# Altium PCB N-BASEU68.PcbDoc
Units mm, origin at the board's own origin, x right, y up, seen from the top; angles counter-clockwise.
Board outline 33.03 x 43.18 mm, 4 copper layers (Top Layer, Signal Layer 1, GND-PLANE, Bottom Layer), stack 1.583 mm thick; 51 components, 57 nets, 221 pads, 80 vias.
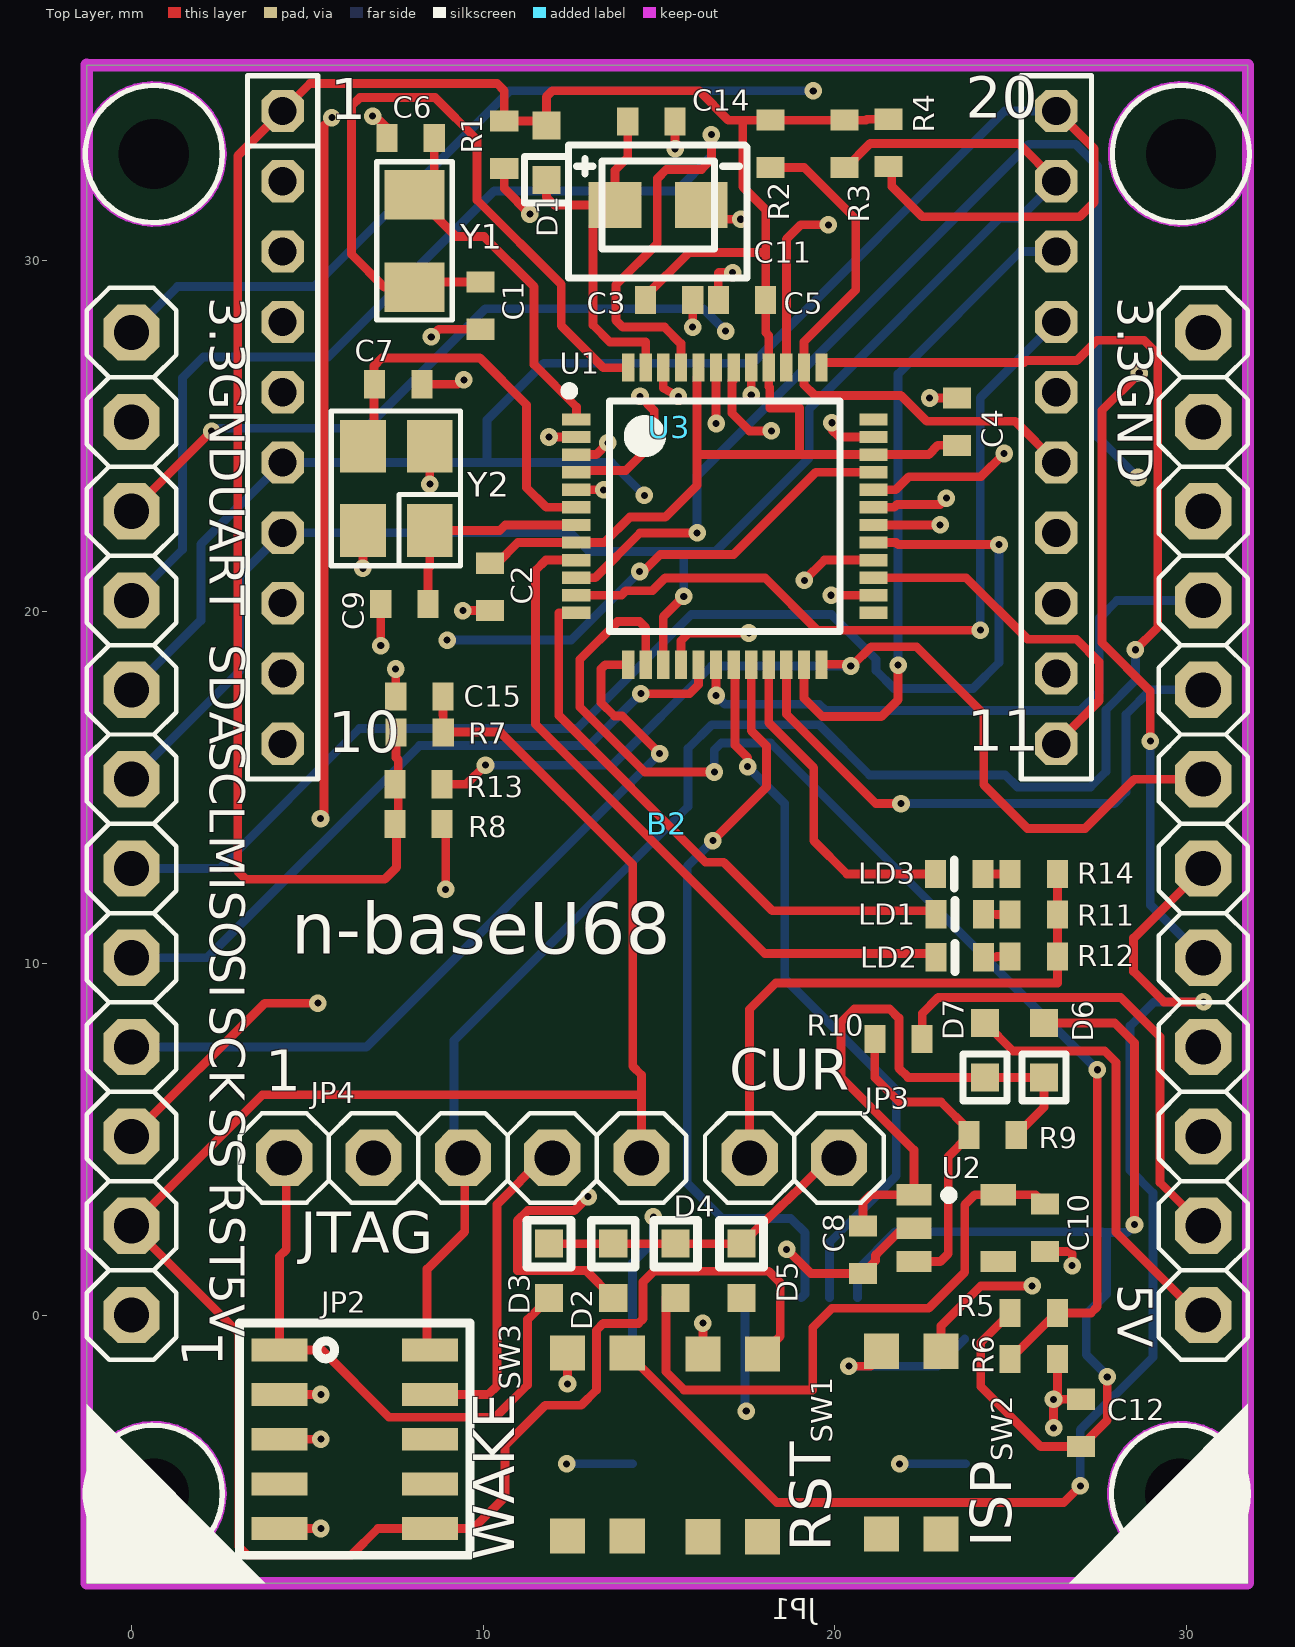
[diagram p0: Top Layer view]
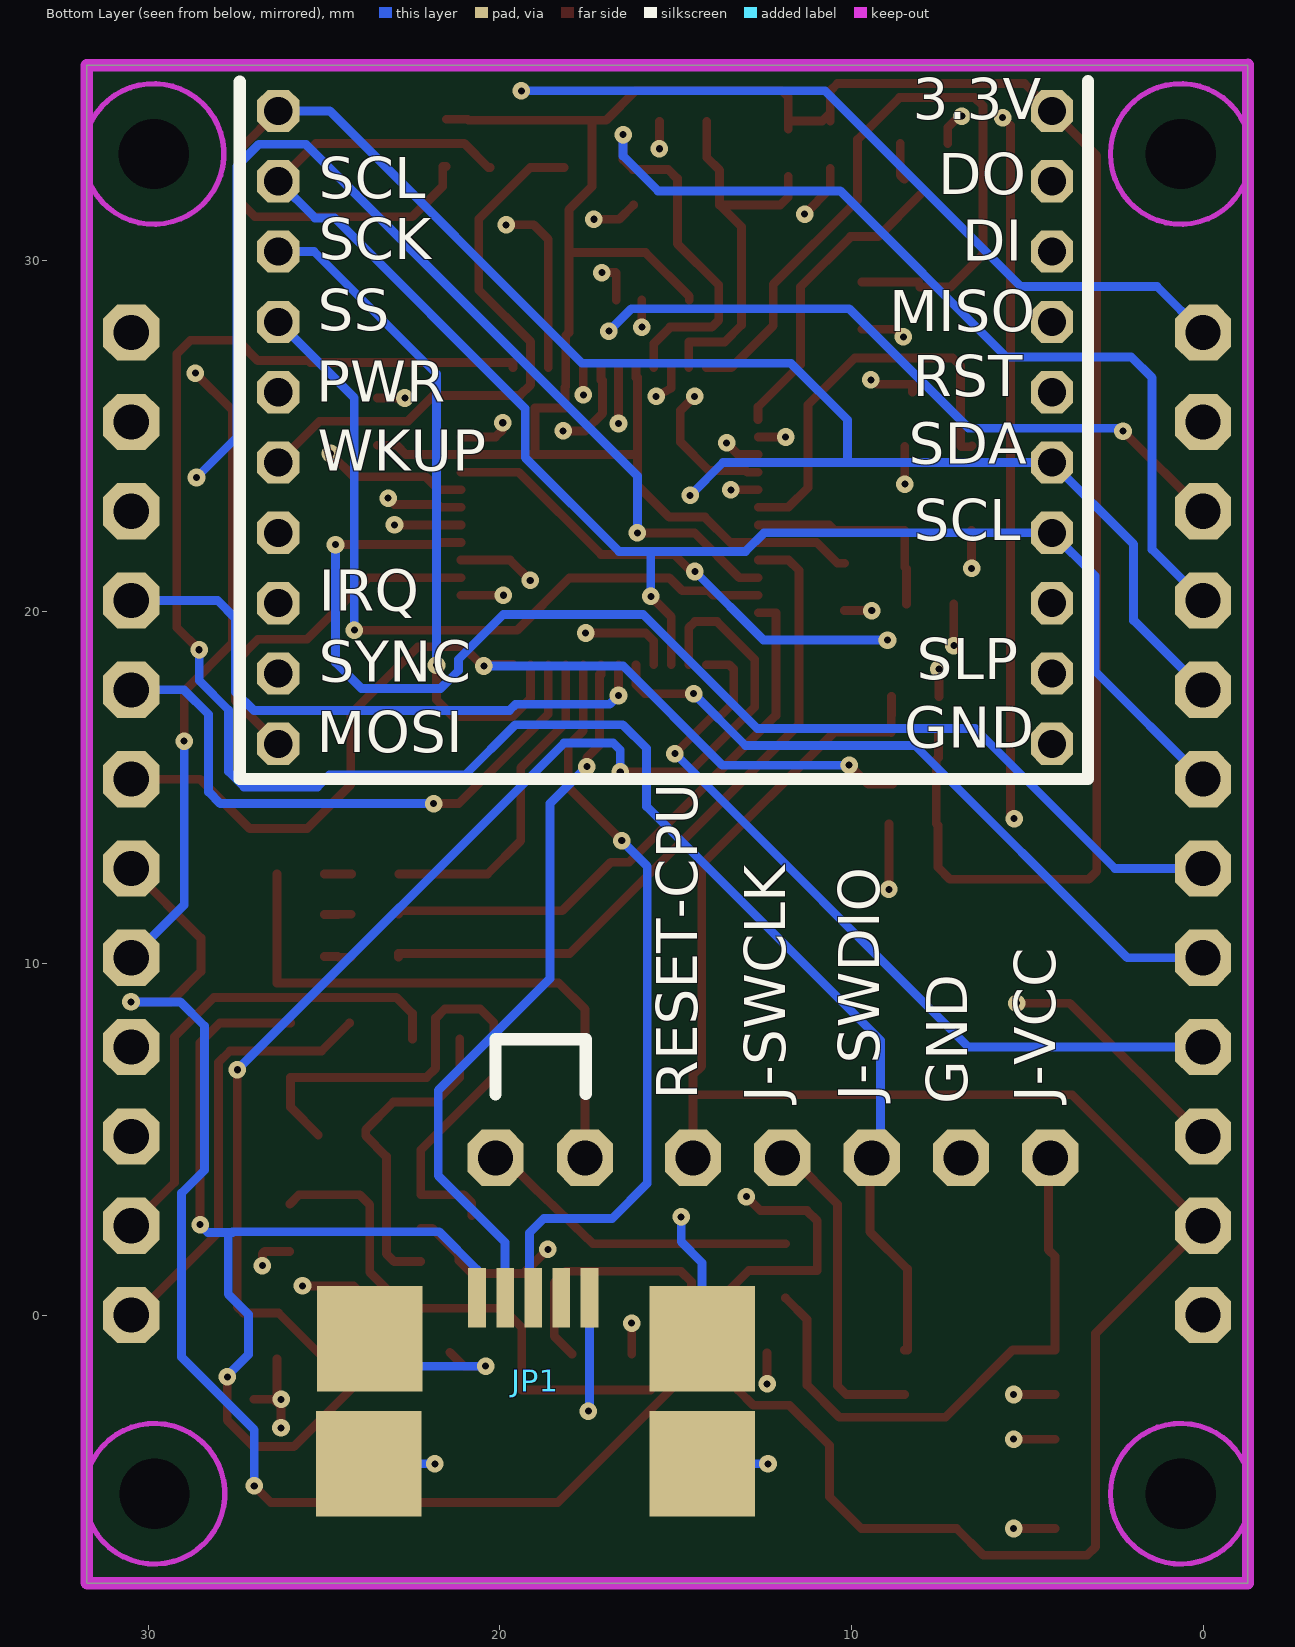
[diagram p1: Bottom Layer view, seen from below]
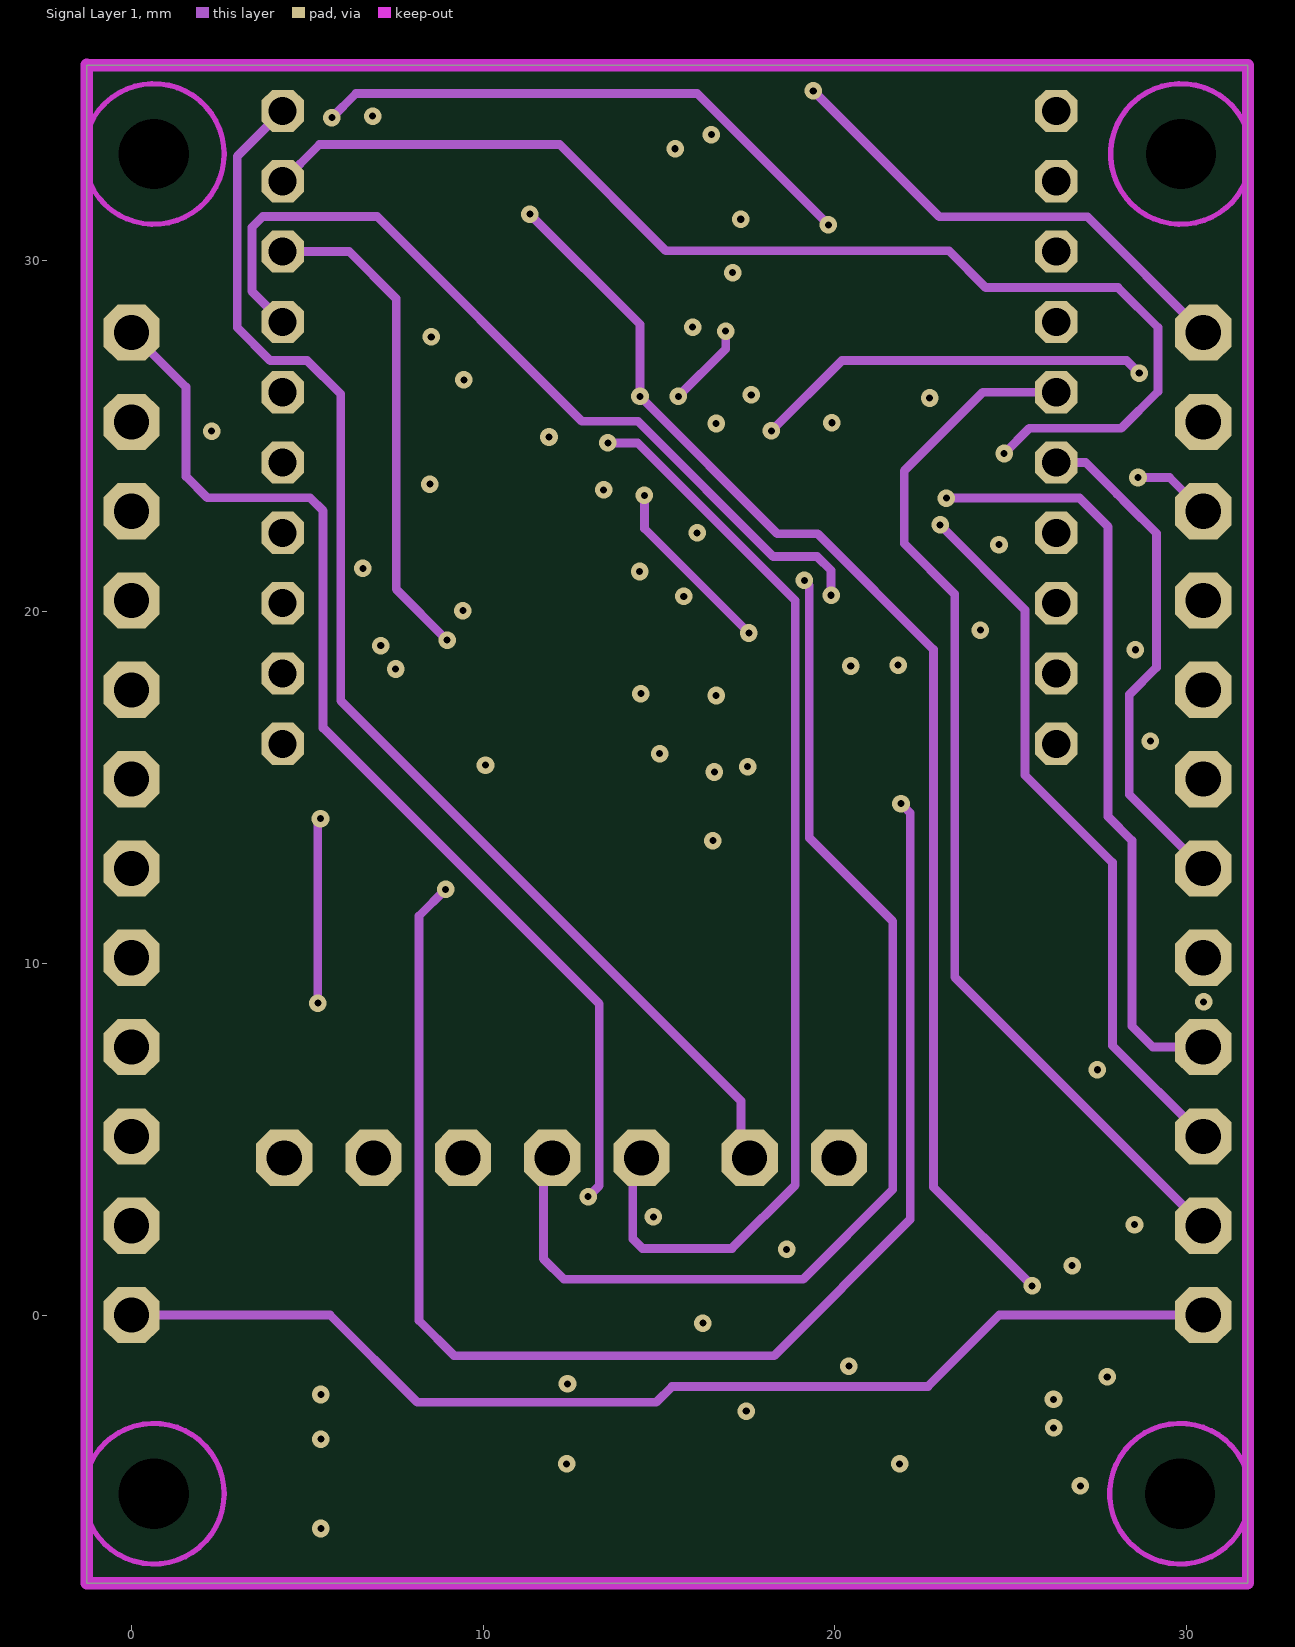
[diagram p2: Signal Layer 1]
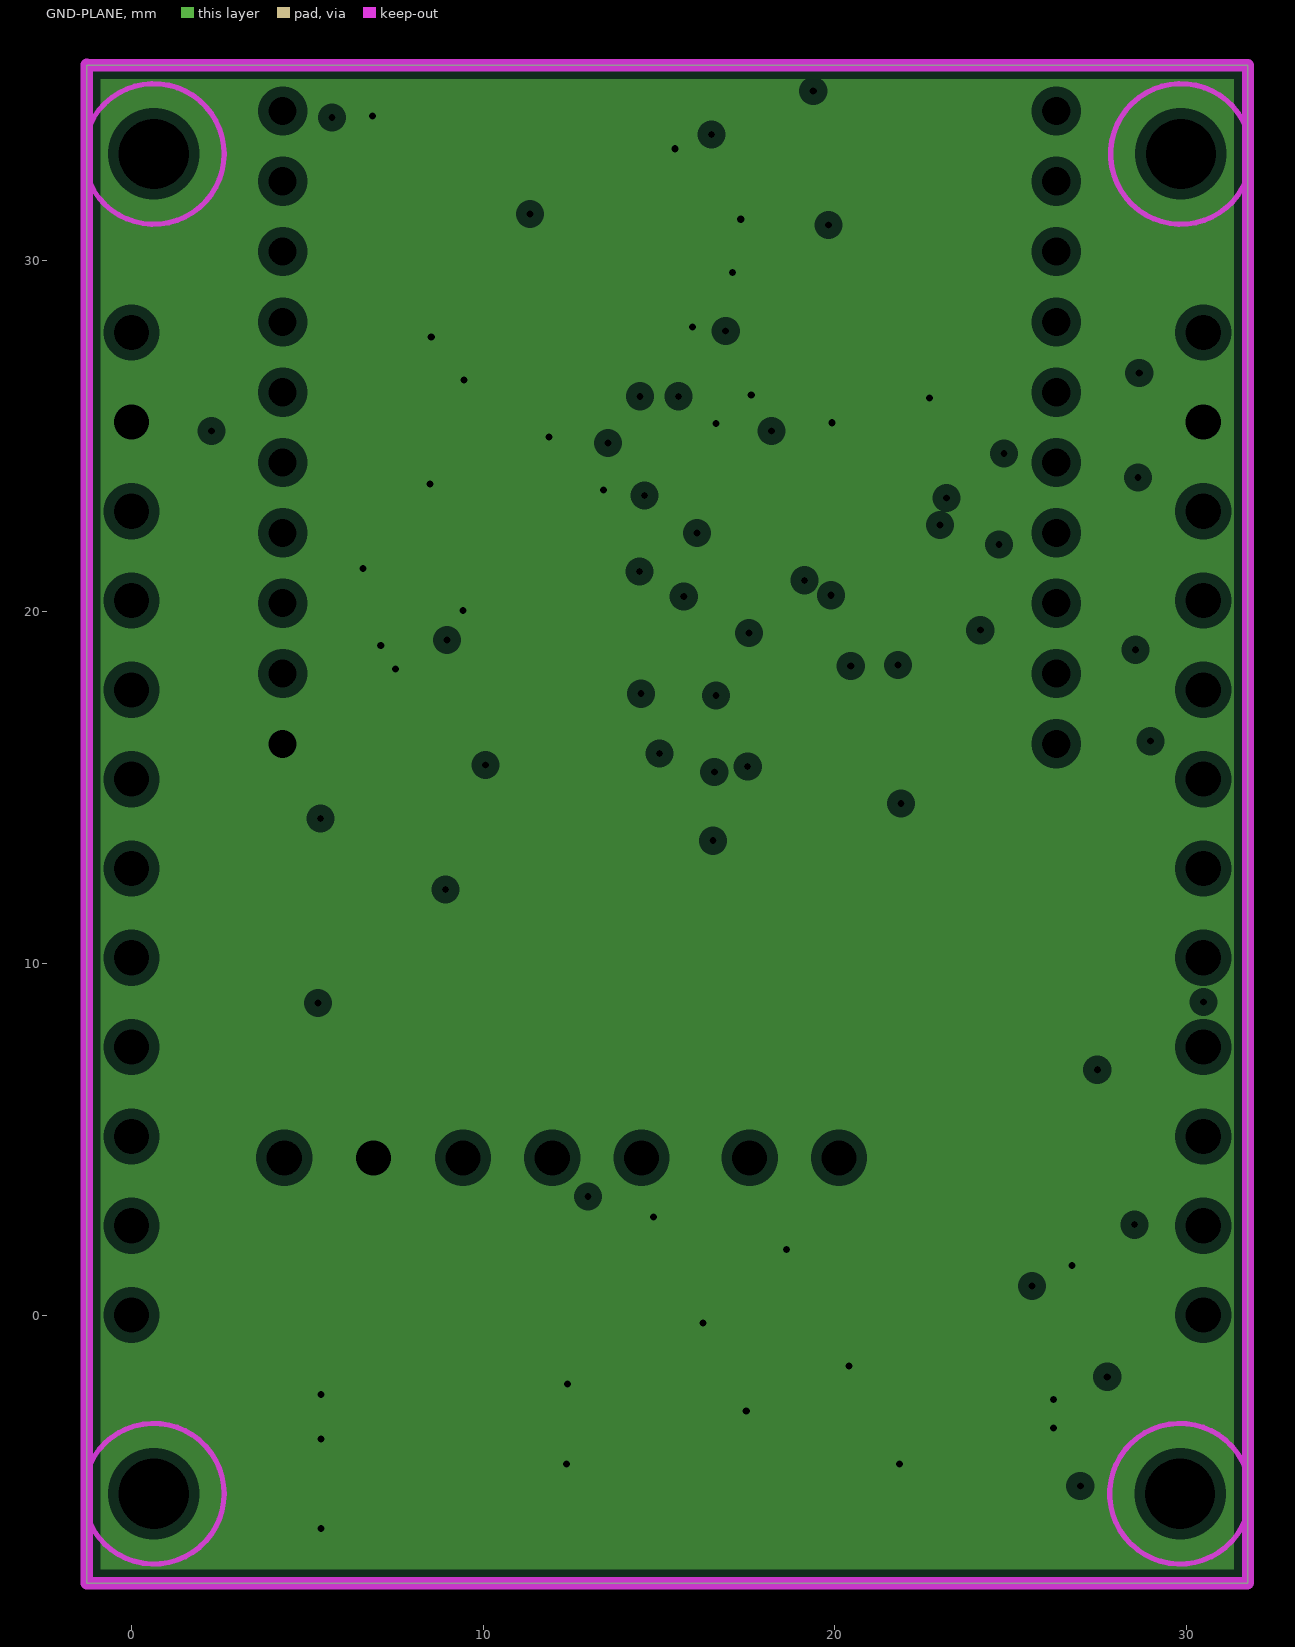
[diagram p3: GND-PLANE, clearances drawn from the general rule]

## Layer stack, top to bottom
Top Solder: solder mask 0.0102, Solder Resist, Dk 3.5
Top Layer: signal copper 0.0356
Dielectric1: core 0.48, FR-4, Dk 4.8
Signal Layer 1: signal copper 0.036
Dielectric 3: prepreg 0.48, Dk 4.2
GND-PLANE: plane copper 0.0356, net GND
Dielectric2: core 0.48, FR-4, Dk 4.2
Bottom Layer: signal copper 0.0356
Bottom Solder: solder mask 0.0102, Solder Resist, Dk 3.5

## Board outline
-1.275,-7.625 31.75,-7.625 31.75,35.55 -1.275,35.55

## Design rules (kind name [scope] priority, off if disabled: settings)
Clearance "Clearance IN CLASS 1mm" [(InNetClass('CL-1mm'))] p1 off: gap=1
Clearance Clearance_GND_PLANE [InNamedPolygon('GND_POLY_TOP')] p2 off: gap=0.4
Clearance Clearance_+5V_POLY [InNamedPolygon('poly_+5V-bottom')] p3 off: gap=0.5
Clearance [All] p4: gap=0.15
MinimumAnnularRing [All] p1: minimumring=0.149
PlaneClearance [All] p1: clearance=0.3
PlaneConnect Plane_ConnectStyle_1 [(Name = 'C1-1') Or (Name = 'C1-2') Or (Name = 'C2-1') Or (Name = 'C2-2') Or (Name = 'C3-1') Or (Name = 'C3-2') Or (Name = 'C4-1') Or (Name = 'C4-2') Or (Name = 'C5-1') Or (Name = 'C5-2') Or (Name = 'C6-1') Or (Name = 'C6-2') Or (Name = 'C7-1')] p1 off: planeconnectstyle=Relief reliefexpansion=1.27 reliefentries=4 reliefconductorwidth=0.381 reliefairgap=0.508
PlaneConnect [All] p2: planeconnectstyle=Direct reliefexpansion=0.635 reliefentries=4 reliefconductorwidth=0.305 reliefairgap=0.254
PolygonConnect [All] p1: connectstyle=Direct reliefconductorwidth=0.254 reliefentries=4 polygonreliefangle="90 Angle" airgapwidth=0.254
RoomDefinition N-BASEU68 [InComponentClass('N-BASEU68')] p1: confinementstyle=ConfineIn formatcopy=TRUE lockcomponents=FALSE outline -5.605,46.58 33.13,46.58 33.13,3.4 -5.605,3.4
RoutingVias VIASWITDTH2MM [(InNetClass('W-2mm'))] p1 off: holewidth=1 width=1.8 viastyle="Through Hole" minholewidth=0.4 minwidth=0.7 maxholewidth=1 maxwidth=1.8
RoutingVias VIASWITDTH1MM [(InNetClass('W-2mm'))] p2 off: holewidth=0.5 width=1 viastyle="Through Hole" minholewidth=0.5 minwidth=1 maxholewidth=0.5 maxwidth=1
RoutingVias VIASWITDTH1.5MM [(InNetClass('W-2mm'))] p3 off: holewidth=0.9 width=1.4 viastyle="Through Hole" minholewidth=0.9 minwidth=1.4 maxholewidth=0.9 maxwidth=1.4
RoutingVias [All] p4: holewidth=0.2 width=0.5 viastyle="Through Hole" minholewidth=0.2 minwidth=0.5 maxholewidth=0.2 maxwidth=0.5
SilkToSolderMaskClearance SilkscreenOverComponentPads [IsPad] p1: minsilkscreentomaskgap=0.254 clearancetoexposedcopper=TRUE
SolderMaskExpansion [All] p1: expansion=0
Width 12V_PLANE [(InNet('+12V')) and (IsPolygon)] p1 off: maxlimit=0.3 minlimit=0.2 preferedwidth=0.2
Width GND_PLANE [(InNet('GND'))  and (IsPolygon)] p2 off: maxlimit=0.3 minlimit=0.2 preferedwidth=0.2
Width WIDTH2MM [(InNetClass('W-2mm'))] p3 off: maxlimit=2 minlimit=0.25 preferedwidth=2
Width WIDTH1.5MM [(InNetClass('W-1.5mm'))] p4 off: maxlimit=2 minlimit=0.5 preferedwidth=1.5
Width "WIDTH 1MM" [(InNetClass('W-1mm'))] p5 off: maxlimit=2 minlimit=0.75 preferedwidth=1
Width WIDTH0.5MM [(InNetClass('W-0.5mm'))] p6 off: maxlimit=2 minlimit=0.25 preferedwidth=0.5
Width WIDTH0.25MM [(InNetClass('W-0.25mm'))] p7 off: maxlimit=2 minlimit=0.2 preferedwidth=0.25
Width [All] p8: maxlimit=2 minlimit=0.25 preferedwidth=0.25
27 further rules are at their usual default settings.

## Components (designator, comment, footprint, x,y, rotation, side; value= is the part's Value field where it differs from the comment)
B2 "N-GMS" N-GMS 0,33.025 r270 top locked
C1 "22pF" 0603_cap 9.925,28.725 r270 top
C2 "100nF" 0603_cap 10.2,20.725 r270 top
C3 "100nF" 0603_cap 15.275,28.875 r0 top
C4 "100nF" 0603_cap 23.475,25.4 r90 top
C5 "100nF" 0603_cap 17.375,28.875 r180 top
C6 "18pF" 0603_cap 7.95,33.475 r180 top
C7 "6.8pF" 0603_cap 7.575,26.475 r0 top
C8 "1uF/MLCC" 0603_CAP 20.8,1.85 r90 top
C9 "6.8pF" 0603_cap 7.775,20.225 r180 top
C10 "1uF/MLCC" 0603_CAP 25.975,2.475 r90 top
C11 "0.011F" "SUPERCAP  PAS3225P3R3113" 14.975,31.625 r0 top
C12 "100nF" 0603_cap 27,-3.05 r270 top
C14 "10uF/MLCC" 0603_CAP 14.8,33.95 r180 top
C15 "100nF" 0603_cap 8.2,17.6 r180 top
D1 "NSR20F30NXT5G" 0603_DIODE-CDSU101A 11.8,33.075 r270 top
D2 "NSR20F30NXT5G" 0603_DIODE-CDSU101A 13.7,1.25 r90 top
D3 "NSR20F30NXT5G" 0603_DIODE-CDSU101A 11.875,1.25 r90 top
D4 "NSR20F30NXT5G" 0603_DIODE-CDSU101A 15.475,1.25 r90 top
D5 "NSR20F30NXT5G" 0603_DIODE-CDSU101A 17.35,1.25 r90 top
D6 "NSR20F30NXT5G" 0603_DIODE-CDSU101A 25.95,7.55 r270 top
D7 "NSR20F30NXT5G" 0603_DIODE-CDSU101A 24.275,7.55 r270 top
JP1 "USB-MINI-B" USB-MINI-B-HIR-UX60A-MB-5ST 17.4,-0.325 r0 bottom
JP2 "Header 5X2 1.27mm" 2x5-1.27mm-HARWIN-855-M50-3600542 6.35,-3.525 r270 top
JP3 "HEADER-2" 1X02 18.85,4.475 r180 top
JP4 "HEADER_5" 1X05 9.425,4.475 r0 top
LD1 "LED_RED" 0603_LED_RED 23.569,11.403 r180 top
LD2 "LED_GRN" 0603_LED_GRN 23.569,10.179 r180 top
LD3 "LED_BLU" 0603_LED_BLU 23.55,12.55 r180 top
R1 "10K" 0603_res 10.6,33.275 r90 top
R2 "10K" 0603_res 18.175,33.3 r90 top
R3 "10K" 0603_res 20.275,33.3 r90 top
R4 "10K" 0603_res 21.525,33.325 r90 top
R5 "10K" 0603_res 25.648,0.063 r0 top
R6 "18K" 0603_res 25.648,-1.245 r0 top
R7 "10K" 0603_res 8.206,16.57 r180 top
R8 "10K" 0603_res 8.175,13.975 r180 top
R9 "0R" 0603_res 24.475,5.125 r0 top
R10 "0R" 0603_res 21.8,7.856 r0 top
R11 "1K" 0603_res 25.65,11.4 r0 top
R12 "1K" 0603_res 25.65,10.2 r0 top
R13 "10K" 0603_res 8.175,15.1 r180 top
R14 "680R" 0603_res 25.65,12.55 r0 top
SW1 "EVQ-P2202M" BUTTON_4.7x3.5mm 16.95,-3.8 r0 top
SW2 "EVQ-P2202M" BUTTON_4.7x3.5mm 22.025,-3.725 r0 top
SW3 "EVQ-P2202M" BUTTON_4.7x3.5mm 13.1,-3.775 r0 top
U1 "LPC11U68JBD48" SOT313-2_V 12.45,25.475 r0 top
U2 "TPS78233" SOT23-5_0.95MM-NOSILK 23.45,2.475 r270 top
U3 "N-NODE24-20pin" N-NODE24-20pins 4.3,34.25 r0 top locked
Y1 "FC135-32.76KAA3" CRYSTAL-3.2X1.5 8.05,30.55 r270 top
Y2 "12MHz/10pF" CRY-SMD4-EPSON-FA238V 7.533,23.515 r90 top

## Footprints (in the part's own frame and the unit in brackets; to place one, negate y for a bottom-side part, rotate by r counter-clockwise, add the part's x,y. Pads: shape width x height; smd on the part's side, far side on the other; paste and mask are expansions set on the pad)
1X02 [mil]
  oct 63x63 hole 39.37: 1(-50,0) 2(50,0)
  silkscreen extent -100,-50 100,50, body extent -100,-50 100,50, height 398
1X05 [mil]
  oct 63x63 hole 39.37: 1(-200,0) 2(-100,0) 3(0,0) 4(100,0) 5(200,0)
  silkscreen extent -250,-50 250,50
2x5-1.27mm-HARWIN-855-M50-3600542 [mm]
  rect 0.65x1.6 smd paste+0: 1(-2.54,-2.14) 2(-2.54,2.14) 3(-1.27,-2.14) 4(-1.27,2.14) 5(0,-2.14) 6(0,2.14) 7(1.27,-2.14) 8(1.27,2.14) 9(2.54,-2.14) 10(2.54,2.14)
  silkscreen extent -3.3,-3.27 3.3,3.28, body extent -3.18,-2.75 3.18,2.75, height 4.5
0603_cap [mm]
  rect 0.6x0.8 smd: 1(-0.66,0) 2(0.686,0)
  body extent -0.8,-0.4 0.8,0.4, height 0.3
0603_CAP [mm]
  rect 0.6x0.8 smd: 1(-0.66,0) 2(0.686,0)
  body extent -0.8,-0.4 0.8,0.4, height 0.3
0603_DIODE-CDSU101A [mm]
  rect 0.8x0.8 smd: 1(-0.76,0) 2(0.786,0)
  silkscreen extent 0.13,-0.63 1.45,0.63, body extent -0.9,-0.5 0.9,0.5, height 0.85
0603_LED_BLU [mm]
  rect 0.6x0.8 smd: 1(-0.66,0) 2(0.686,0)
  silkscreen extent 0.15,-0.4 0.15,0.4, body extent -0.81,-0.4 0.81,0.4, height 0.6
0603_LED_GRN [mm]
  rect 0.6x0.8 smd: 1(-0.66,0) 2(0.686,0)
  silkscreen extent 0.15,-0.4 0.15,0.4, body extent -0.81,-0.4 0.81,0.4, height 0.6
0603_LED_RED [mm]
  rect 0.6x0.8 smd: 1(-0.66,0) 2(0.686,0)
  silkscreen extent 0.15,-0.4 0.15,0.4, body extent -0.81,-0.4 0.81,0.4, height 0.6
0603_res [mm]
  rect 0.6x0.8 smd: 1(-0.66,0) 2(0.686,0)
  body extent -0.8,-0.4 0.8,0.4, height 0.3
BUTTON_4.7x3.5mm [mm] "TACTILE BUTTON 4.7x3.5mm Panasonic EVQ-P2202M"
  rect 1x1 smd: 1(-0.7,2.7) 2(1,2.7) 3(-0.7,-2.5) 4(1,-2.5)
  body extent -1.61,-2.63 1.89,2.87, height 2.15
CRY-SMD4-EPSON-FA238V [mm]
  rect 1.5x1.3 smd: 1(-1.2,-0.95) 2(1.2,-0.95) 3(1.2,0.95) 4(-1.2,0.95)
  silkscreen extent -2.2,-1.83 2.2,1.85, body extent -1.6,-1.25 1.6,1.25, height 0.77
CRYSTAL-3.2X1.5 [mm]
  rect 1.4x1.7 smd: 1(1.313,0) 2(-1.312,0)
  silkscreen extent -2.25,-1.07 2.25,1.07, body extent -1.58,-0.76 1.64,0.76, height 0.91
N-GMS [mil]
  round 39.37 hole 78.74 paste+0: 0(0,1175) 0(0,25) 0(1500,1174) 0(1500,25)
  oct 63x63 hole 39.37: 1(200,0) 2(300,0) 3(400,0) 4(500,0) 5(600,0) 6(700,0) 7(800,0) 8(900,0) 9(1000,0) 10(1100,0) 11(1200,0) 12(1300,0) 13(1300,1200) 14(1200,1200) 15(1100,1200) 16(1000,1200) 17(900,1200) 18(800,1200) 19(700,1200) 20(600,1200) 21(500,1200) 22(400,1200) 23(300,1200) 24(200,1200)
  Keep-Out Layer circle w5.91: c1500,1174 r78.74
  Keep-Out Layer circle w5.91: c0,1175 r78.74
  Keep-Out Layer circle w5.91: c0,25 r78.74
  Keep-Out Layer circle w5.91: c1500,25 r78.74
  silkscreen extent -77,-52 1600,1252, body extent -75,-51 1577,1251, height 335
N-NODE24-20pins [mm]
  oct 1.2x1.2 hole 0.8: 1(0,0) 2(0,-2) 3(0,-4) 4(0,-6) 5(0,-8) 6(0,-10) 7(0,-12) 8(0,-14) 9(0,-16) 10(0,-18) 11(22,-18) 12(22,-16) 13(22,-14) 14(22,-12) 15(22,-10) 16(22,-8) 17(22,-6) 18(22,-4) 19(22,-2) 20(22,0)
  silkscreen extent -1,-19 23,1, body extent -1,-19 23,1, height 4.5
SOT23-5_0.95MM-NOSILK [mm]
  rect 0.6x1 smd: 1(-0.95,-1.2) 2(0,-1.2) 3(0.95,-1.2) 4(0.95,1.2) 5(-0.95,1.2)
  silkscreen extent -1.06,-0.33 -0.81,-0.08, body extent -1.45,-1.4 1.45,1.4, height 1.45
SOT313-2_V [mm] "Thin QFP, 48-Leads, Body 7x7mm, Pitch 0.5mm, NXP Recommended"
  rect 0.8x0.35 smd: 1(0.2,0) 2(0.2,-0.5) 3(0.2,-1) 4(0.2,-1.5) 5(0.2,-2) 6(0.2,-2.5) 7(0.2,-3) 8(0.2,-3.5) 9(0.2,-4) 10(0.2,-4.5) 11(0.2,-5) 12(0.2,-5.5) 25(8.65,-5.5) 26(8.65,-5) 27(8.65,-4.5) 28(8.65,-4) 29(8.65,-3.5) 30(8.65,-3) 31(8.65,-2.5) 32(8.65,-2) 33(8.65,-1.5) 34(8.65,-1) 35(8.65,-0.5) 36(8.65,0)
  rect 0.35x0.8 smd: 13(1.675,-6.975) 14(2.175,-6.975) 15(2.675,-6.975) 16(3.175,-6.975) 17(3.675,-6.975) 18(4.175,-6.975) 19(4.675,-6.975) 20(5.175,-6.975) 21(5.675,-6.975) 22(6.175,-6.975) 23(6.675,-6.975) 24(7.175,-6.975) 37(7.175,1.475) 38(6.675,1.475) 39(6.175,1.475) 40(5.675,1.475) 41(5.175,1.475) 42(4.675,1.475) 43(4.175,1.475) 44(3.675,1.475) 45(3.175,1.475) 46(2.675,1.475) 47(2.175,1.475) 48(1.675,1.475)
  silkscreen extent -0.12,-6.02 7.7,0.93, body extent -0.07,-7.25 8.93,1.75, height 1.6
"SUPERCAP  PAS3225P3R3113" [mm]
  rect 1.5x1.3 smd: 1(-1.225,-0.05) 2(1.225,-0.05)
  silkscreen extent -2.32,-1.3 2.31,1.28, body extent -1.7,-1.4 1.7,1.3, height 0.9
USB-MINI-B-HIR-UX60A-MB-5ST [mm]
  rect 0.5x1.7 smd: 1(3.25,-0.825) 2(2.45,-0.825) 3(1.65,-0.825) 4(0.85,-0.825) 5(0.05,-0.825)
  rect 3x3 smd: 6(-3.15,3.9) 7(6.325,3.9) 8(-3.15,0.35) 9(6.3,0.35)
  body extent -3.3,-1.15 6.6,7.85, height 4.6

## Part data
C1 C2 C3 C4 C5 C6 C7 C8 C9 C10 C12 C14 C15: library part C, "CAPACITOR"
C11: library part CP_SUPERCAP
D1 D2 D3 D4 D5 D6 D7: library part DIODE, "DIODE"
JP2: library part "Header 5X2", "Header, 5-Pin, Dual row"
LD1 LD2 LD3: library part LED
R1 R2 R3 R4 R5 R6 R7 R8 R9 R10 R11 R12 R13 R14: library part R, "RESISTOR"
SW1 SW2 SW3: library part BUTTON_TACT, "BUTTON TACTILE"
U1: library part LPC11U68JBD48_1
U2: library part NCP702N
Y1: library part XTAL, "CRYSTAL"
Y2: library part XTAL_4PINS, "CRYSTAL"

## Via types
v1: diameter 0.5, hole 0.2, Top Layer to Bottom Layer, tented both sides, 77 vias
v2: diameter 0.5, hole 0.2, Top Layer to Bottom Layer, 3 vias

## Nets (pads, with @x,y where several pads share a name; then routed paths per layer and width w, separated by ;. In a path a pad name is that pad's centre, name@x,y a point inside that pad or via, vN(x,y) a via of type N, cw(c..) or ccw(c..) an arc to the next point about the centre after c; other vN are vias at no path point)
3.3V: C2.1 C3.1 C4.1 C5.1 D1.1 JP3.2 R1.2 R2.2 R3.2 R4.2 R7.2 R8.2 R11.2 R12.2 R13.2 R14.2 U1.8 U1.34 U1.40 U1.44 U3.1 | length 136.5
  Top Layer w0.25: R7.2 7.521,15.864 7.589,15.795 7.589,13.975 7.539,13.925 7.539,12.739 7.2,12.4 3.25,12.4 3.025,12.625 3.025,32.975 U3.1 5.077,35.027 10.398,35.027 10.6,34.825 R1.2@10.6,34.19 ; C2.1 10.397,21.385 10.987,21.975 U1.8 13.445,21.975 14.167,22.697 15.181,22.697 16.087,23.603 U1.44@16.087,26.628 ; R1.2 R1.2@10.6,34.19 ; D1.1@11.8,33.735 D1.1@11.8,33.961 ; C3.1 14.615,28.978 15.859,30.222 18.025,30.222 ; 16.087,24.475 19,24.475 ; U1.44 U1.44@16.125,26.666 ; JP3.2@17.33,4.475 17.575,4.72 17.575,8.698 18.327,9.45 26.336,9.45 R12.2 R11.2 R14.2 ; 17.386,33.986 17.382,33.982 17.382,32.093 18.035,31.44 C5.1 18.035,27.95 18.125,27.86 U1.40 18.125,26.415 18.15,26.39 18.15,25.8 19,25.8 19,24.475 ; R4.2 20.912,34.011 20.887,33.986 R3.2 R2.2 16.976,33.986 16.142,34.82 11.97,34.82 11.8,34.65 D1.1@11.8,33.961 ; C4.1 22.934,24.74 22.67,24.475 U1.34 19,24.475 ; R1.2@10.6,34.19 10.829,33.961 D1.1@11.8,33.961 ; U1.44@16.087,26.628 16.087,26.666 U1.44@16.125,26.666 ; U1.44@16.087,26.628 U1.44@16.125,26.666
  Signal Layer 1 w0.25: U3.1 3.005,32.955 3.005,28.089 3.945,27.149 5.001,27.149 5.952,26.198 5.952,17.473 17.33,6.095 JP3.2@17.33,4.475
3.3V-FTDI: D5.1
3.3V-GMS: B2.1 B2.24 D2.1 | length 74.9
  Top Layer w0.25: v1(12.988,3.375) 12.588,2.975 11.267,2.975 10.975,2.683 10.975,1.275 12.915,1.275 D2.1
  Signal Layer 1 w0.25: B2.1 1.55,26.395 1.55,23.855 2.155,23.25 5.075,23.25 5.45,22.875 5.45,16.704 13.3,8.854 13.3,3.687 v1(12.988,3.375) ; v1(19.389,34.82) 22.97,31.238 27.187,31.238 B2.24
  Bottom Layer w0.25: B2.1 1.312,29.257 5.19,29.257 10.753,34.82 v1(19.389,34.82)
5V-GMS: B2.12 B2.13 D7.1 | length 45
  Top Layer w0.25: D7.1 25.071,7.515 27.675,7.515 28,7.19 28,2.358 30.353,0.005 B2.13
  Signal Layer 1 w0.25: B2.12 5.645,0.005 8.127,-2.477 14.923,-2.477 15.375,-2.025 22.65,-2.025 24.68,0.005 B2.13
#PWROFF: B2.14 R10.2 U3.16 | length 44.3
  Top Layer w0.25: R10.2 22.486,8.582 22.943,9.039 28.126,9.039 29.25,7.915 29.25,3.775 B2.14
  Signal Layer 1 w0.25: U3.16 24.208,26.25 21.975,24.017 21.975,21.946 23.413,20.508 23.413,9.612 B2.14
BLUE: LD3.2 U1.21 | length 9.4
  Top Layer w0.25: U1.21 18.125,16.85 19.404,15.571 19.404,13.496 20.35,12.55 LD3.2
GND: B2.2 B2.23 C1.2 C2.2 C3.2 C4.2 C5.2 C6.2 C7.2 C8.1 C9.2 C10.1 C11.2 C12.1 C14.1 C15.2 JP1.5 JP1.6 JP1.7 JP1.8 JP1.9 JP2.3 JP2.5 JP2.9 JP4.2 R6.2 SW1.1 SW2.1 SW3.1 U1.2 U1.5 U1.35 U1.41 U1.43 U2.2 U3.10 Y2.2 Y2.4 | length 48
  Top Layer w0.25: JP2.9 v1(5.387,-6.065) ; JP2.5 v1(5.387,-3.525) ; JP2.3 v1(5.387,-2.255) ; v1(6.583,21.238) Y2.4 ; v1(6.858,34.102) 6.941,34.102 7.264,33.778 C6.2@7.264,33.325 ; v1(7.089,19.042) C9.2 ; C15.2 v1(7.514,18.377) ; C7.2@8.261,26.25 C7.2 9.275,26.475 9.425,26.625 v2(9.45,26.6) ; v1(8.483,23.638) Y2.2 ; v2(8.525,27.825) 8.739,28.039 C1.2@9.7,28.039 ; v1(9.423,20.039) C2.2 ; v1(11.873,24.975) U1.2 ; v1(12.4,-1.952) SW3.1 ; U1.5 v1(13.427,23.475) ; v1(15.46,33.173) C14.1 ; v1(15.961,28.098) C3.2 ; C11.2 16.606,31.169 v1(17.327,31.169) ; SW1.1 v1(16.25,-0.223) ; v1(16.625,25.36) U1.43 ; C5.2 16.689,29.639 16.702,29.652 v1(17.096,29.652) ; v1(17.625,26.173) U1.41 ; v1(18.633,1.876) 19.319,1.19 C8.1 21.16,1.55 21.16,1.7 ; v1(19.917,25.381) 19.917,25.184 20.125,24.975 U1.35 ; v1(20.401,-1.45) 21.025,-1.45 SW2.1@21.425,-1.05 ; 21.175,1.7 21.175,1.725 21.925,2.475 U2.2 ; v1(22.698,26.086) C4.2 ; C10.1 26.685,1.815 26.752,1.748 v1(26.752,1.408) ; v1(26.221,-2.391) 26.334,-2.279 R6.2 ; v1(26.223,-3.202) 26.223,-2.594 26.428,-2.39 C12.1
  Bottom Layer w0.25: v1(12.373,-4.225) JP1.6 ; JP1.8 14.25,1.495 14.842,2.087 v1(14.842,2.796) ; JP1.5 17.45,-2.693 v1(17.484,-2.727) ; v1(20.401,-1.45) 22.925,-1.45 JP1.9 ; v1(21.848,-4.225) JP1.7
GREEN: LD2.2 U1.9 | length 19.9
  Top Layer w0.25: U1.9 11.784,21.475 11.489,21.18 11.489,16.811 18.017,10.283 22.883,10.283 LD2.2
I2C0_SCL: B2.6 R3.1 U1.15 U3.7 U3.19 | length 46.4
  Top Layer w0.25: U1.15 15.125,19.863 v1(15.706,20.443) ; R3.1 20.328,32.64 21.014,33.325 25.225,33.325 U3.19
  Bottom Layer w0.25: B2.6 3.075,18.32 3.075,21.025 U3.7 12.484,22.25 13.012,21.722 15.75,21.722 ; v1(15.706,20.443) 15.706,21.677 15.75,21.722 ; U3.19 25.257,31.207 24.701,31.207 19.277,25.782 19.277,24.387 16.612,21.722 15.75,21.722
I2C0_SDA: B2.5 R4.1 U1.16 U3.6 U3.20 | length 57.8
  Top Layer w0.25: U1.16 15.625,19.175 15.852,19.402 v1(17.56,19.402) ; R4.1 21.624,32.665 21.624,32.102 22.487,31.238 26.963,31.238 27.375,31.65 27.375,33.175 U3.20
  Signal Layer 1 w0.25: v1(14.588,23.314) 14.588,22.374 v1(17.56,19.402)
  Bottom Layer w0.25: B2.5 1.975,19.76 1.975,21.925 U3.6 10.114,24.25 ; v1(14.588,23.314) 13.652,24.25 10.114,24.25 ; U3.20 24.841,34.25 17.664,27.073 11.723,27.073 10.114,25.464 10.114,24.25
I2C1_SCL: B2.19 R13.1 U1.24 | length 28
  Top Layer w0.25: R13.1 9.524,15.1 v1(10.067,15.643) ; U1.24 19.625,18.513 20.405,18.513 v1(20.455,18.462) 20.487,18.462 21.038,19.013 22.327,19.013 24.24,17.099 24.24,15.084 25.485,13.839 27.114,13.839 28.52,15.245 B2.19
  Bottom Layer w0.25: v1(10.067,15.643) 13.674,15.643 16.494,18.462 v1(20.455,18.462)
I2C1_SDA: B2.20 R8.1 U1.22 | length 59.3
  Top Layer w0.25: v1(8.935,12.112) R8.1@8.935,13.975 ; U1.22 18.625,17.1 21.174,14.551 v1(21.883,14.551)
  Signal Layer 1 w0.25: v1(8.935,12.112) 8.175,11.352 8.175,-0.15 9.175,-1.15 18.275,-1.15 22.15,2.725 22.15,14.284 v1(21.883,14.551)
  Bottom Layer w0.25: v1(21.883,14.551) 27.951,14.551 28.283,14.883 28.283,17.083 28.985,17.785 B2.20
IRQ: U3.13
ISP: R1.1 SW2.2 U1.4 | length 46.3
  Top Layer w0.25: R1.1 10.6,32.046 v1(11.331,31.315) ; U1.4 12.962,23.975 13.012,24.025 14.055,24.025 14.867,24.838 14.867,25.727 v1(14.461,26.133) ; SW2.2 23.025,-0.3 24.16,0.835 v1(25.612,0.835)
  Signal Layer 1 w0.25: v1(11.331,31.315) 14.461,28.185 v1@14.461,26.359 ; v1(14.461,26.133) 18.369,22.225 19.512,22.225 22.807,18.93 22.807,3.639 v1(25.612,0.835)
J-VCC: D3.1 JP2.1 JP4.1 | length 16.6
  Top Layer w0.25: JP4.1@4.095,4.475 4.4,4.17 4.4,1.863 4.21,1.673 JP2.1 5.41,-0.985 7.325,-2.9 10.345,-2.9 11.261,-1.985 11.261,-0.125 D3.1
MISO0: U1.26 U3.4 | length 25.7
  Top Layer w0.25: v1(19.897,20.475) U1.26
  Signal Layer 1 w0.25: U3.4 3.425,29.125 3.425,30.934 3.741,31.25 6.982,31.25 12.81,25.422 14.403,25.422 18.25,21.575 19.502,21.575 19.897,21.18 v1(19.897,20.475)
MOSI0: U1.27 U3.11 | length 10.3
  Top Layer w0.25: U1.27 23.734,20.975 25.484,19.225 26.875,19.225 27.525,18.575 27.525,17.475 U3.11
NetC8_2: C8.2 D6.2 D7.2 R9.2 U2.1 | length 17.2
  Top Layer w0.25: C8.2@20.8,2.836 20.8,3.2 21.025,3.425 U2.1 22.25,4.7 20.175,6.775 20.175,8.325 20.559,8.709 21.566,8.709 21.825,8.45 21.825,7.025 22.086,6.764 D7.2 D6.2 25.95,5.914 R9.2
NetC10_2: C10.2 D4.1 U2.5 | length 17.9
  Top Layer w0.25: D4.1 15.2,0.49 15.2,-1.609 15.716,-2.125 19.375,-2.125 19.375,-0.347 19.922,0.2 22.675,0.2 23.7,1.225 23.7,3.139 23.986,3.425 U2.5 25.711,3.425 C10.2
NetD2_2: D2.2 D3.2 D4.2 D5.2 JP3.1 | length 9
  Top Layer w0.25: D3.2 D2.2 D4.2 D5.2 19.049,3.654 JP3.1@19.87,4.475
NetLD1_1: LD1.1 R11.1 | length 0.8
  Top Layer w0.25: LD1.1 24.596,11.403 24.599,11.4 R11.1
NetLD2_1: LD2.1 R12.1 | length 0.8
  Top Layer w0.25: LD2.1 24.596,10.179 24.617,10.2 R12.1
NetLD3_1: LD3.1 R14.1 | length 0.8
  Top Layer w0.25: LD3.1 R14.1
NetR5_2: R5.2 R6.1 U1.14 | length 34.7
  Top Layer w0.25: U1.14 14.625,19.55 14.45,19.725 13.825,19.725 12.75,18.65 12.75,17.298 14.6,15.448 v1(16.575,15.448) ; R6.1 26.295,0.063 R5.2 27.288,0.063 27.466,0.241 v1(27.466,6.981)
  Bottom Layer w0.25: v1(16.575,15.448) 16.575,16.075 16.775,16.275 18.172,16.275 v1(27.466,6.981)
NetR9_1: R9.1 R10.1 U2.3 | length 9.2
  Top Layer w0.25: R10.1 21.14,6.76 21.836,6.064 23.022,6.064 23.815,5.272 R9.1 23.815,5.102 23.225,4.512 23.225,1.75 23,1.525 U2.3
PIO0_11/ADC9: B2.15 U1.30 | length 22.4
  Top Layer w0.25: U1.30 v1(22.995,22.475)
  Signal Layer 1 w0.25: v1(22.995,22.475) 25.408,20.062 25.408,15.363 27.9,12.872 27.9,7.665 B2.15
PIO0_12/ADC8: B2.16 U1.31 | length 23.9
  Top Layer w0.25: U1.31 21.692,22.975 21.775,23.058 22.994,23.058 v1(23.173,23.237)
  Signal Layer 1 w0.25: v1(23.173,23.237) 26.963,23.237 27.775,22.425 27.775,14.174 28.45,13.499 28.45,8.225 29.05,7.625 B2.16
PIO1_13: U1.36
PIO1_17: B2.17 U1.42 | length 32.4
  Top Layer w0.25: U1.42 17.125,26.59 17.077,26.59 17.077,25.65 17.578,25.15 v1(18.2,25.15) ; v1(28.66,26.793) 27.601,25.735 27.601,19.124 28.975,17.75 v1(28.975,16.325)
  Signal Layer 1 w0.25: v1(18.2,25.15) 20.199,27.149 28.304,27.149 v1(28.66,26.793)
  Bottom Layer w0.25: v1(28.975,16.325) 28.975,11.67 B2.17
RED: LD1.2 U1.12 | length 16.6
  Top Layer w0.25: U1.12 12.15,19.975 12.15,17.058 16.325,12.883 16.842,12.883 18.222,11.503 22.883,11.503 LD1.2
RESET-CPU: B2.11 C15.1 JP2.10 JP4.5 R7.1 SW1.2 U1.3 | length 99.2
  Top Layer w0.25: C15.1 8.86,17.072 8.867,17.065 R7.1@8.867,16.583 ; R7.1 R7.1@8.867,16.583 ; U1.3 13.216,24.475 v1(13.549,24.808) ; JP4.5 14.505,6.271 ; SW1.2 18.45,-0.6 18.45,0.925 18.125,1.25 14.851,1.25 14.55,0.949 14.55,-0.1 14.418,-0.232 13.42,-0.232 13.225,-0.427 13.225,-2.125 12.79,-2.56 11.765,-2.56 10.625,-3.7 10.625,-5.16 9.72,-6.065 JP2.10 7.012,-6.065 6.252,-6.825 3.3,-6.825 3.056,-6.581 3.056,-0.511 B2.11 3.726,6.271 14.505,6.271 ; R7.1@8.867,16.583 10.492,16.583 14.255,12.82 14.255,7.08 14.505,6.83 14.505,6.271
  Signal Layer 1 w0.25: v1(13.549,24.808) 14.392,24.808 18.875,20.325 18.875,3.7 17.075,1.9 14.525,1.9 14.255,2.17 JP4.5@14.255,4.475
RESET-TGT: U3.5
RTC-BAT: C11.1 C14.2 D1.2 U1.47 | length 11.3
  Top Layer w0.25: D1.2@11.8,32.389 11.8,31.8 12.025,31.575 C11.1 ; C14.2 14.114,32.923 13.75,32.559 C11.1 ; U1.47 14.625,27.675 13.609,27.675 13.125,28.159 13.125,30.95 C11.1
RTCXIN: C1.1 U1.48 Y1.1 | length 20.9
  Top Layer w0.25: Y1.1 7.191,29.237 6.257,30.172 6.257,34.388 6.496,34.627 8.634,34.627 9.825,33.436 9.825,31.716 12.225,29.316 12.225,28.14 13.42,26.946 14.125,26.946 U1.48 ; Y1.1@8.085,29.385 C1.1@9.7,29.385
RTCXOUT: C6.1 U1.1 Y1.2 | length 9.8
  Top Layer w0.25: Y1.2 9.237,30.675 10.025,30.675 11.45,29.25 11.45,27.036 12.658,25.828 12.658,25.475 U1.1 ; Y1.2@8.494,32.306 8.61,32.423 C6.1@8.61,33.325
RX1: U1.32 U3.2 | length 38.6
  Top Layer w0.25: U1.32 21.734,23.475 22.106,23.847 24.156,23.847 v1(24.816,24.507)
  Signal Layer 1 w0.25: U3.2 5.346,33.296 12.175,33.296 15.198,30.273 23.249,30.273 24.298,29.225 28.057,29.225 29.193,28.089 29.193,26.268 28.15,25.225 25.534,25.225 v1(24.816,24.507)
RX2: B2.22 U1.10 | length 32.7
  Top Layer w0.25: U1.10 13.189,20.975 14.461,22.247 v1(16.087,22.247)
  Signal Layer 1 w0.25: v1(28.625,23.825) 29.52,23.825 B2.22
  Bottom Layer w0.25: v1(16.087,22.247) 16.087,23.872 25.514,33.3 26.852,33.3 27.475,32.677 27.475,24.975 v1(28.625,23.825)
RXD0: B2.4 U1.45 | length 35
  Top Layer w0.25: U1.45 15.625,27.632 15.157,28.1 13.975,28.1 13.775,28.3 13.775,29.297 14.95,30.472 14.95,32.325 15.21,32.585 16.21,32.585 16.493,32.868 v1(16.493,33.575)
  Bottom Layer w0.25: B2.4 1.45,21.775 1.45,26.66 2.04,27.251 5.596,27.251 10.321,31.975 15.502,31.975 16.493,32.966 v1(16.493,33.575)
SCK0: U1.23 U3.18 | length 19.2
  Top Layer w0.25: U1.23 19.125,17.55 19.65,17.025 21.325,17.025 21.802,17.502 v1(21.802,18.488)
  Bottom Layer w0.25: v1(21.802,18.488) 21.802,26.768 25.284,30.25 U3.18
SLEEP: U3.9
SS0: U1.11 U3.17 | length 22
  Top Layer w0.25: U1.11 13.934,20.475 14.061,20.602 14.814,20.602 15.181,20.968 18.017,20.968 19.504,19.481 v1(24.138,19.481)
  Bottom Layer w0.25: v1(24.138,19.481) 24.138,26.088 U3.17
SSP1_MISO/ADC11: B2.7 U1.29 | length 36
  Top Layer w0.25: U1.29 21.751,21.975 21.809,21.917 v1(24.672,21.917)
  Bottom Layer w0.25: B2.7 2.506,12.705 6.485,16.684 12.679,16.684 15.921,19.927 19.905,19.927 21.175,18.657 21.175,18.335 21.682,17.827 23.935,17.827 24.672,18.564 v1(24.672,21.917)
SSP1_MOSI: B2.8 U1.17 | length 19.9
  Top Layer w0.25: v1(14.486,17.675) 15.871,17.675 16.125,17.929 U1.17
  Bottom Layer w0.25: B2.8 2.157,10.165 8.194,16.202 13.013,16.202 v1(14.486,17.675)
SSP1_SCK: B2.9 U1.13 | length 22.5
  Top Layer w0.25: U1.13 13.475,18.5 13.35,18.375 13.35,17.425 13.735,17.04 13.953,17.04 v1(15.02,15.973)
  Bottom Layer w0.25: B2.9 6.672,7.625 v1(15.02,15.973)
SSP1_SS/ADC1: B2.10 U1.39 | length 53.2
  Top Layer w0.25: B2.10 3.79,8.875 v1(5.3,8.875) ; v1(5.375,14.125) 5.475,14.225 5.475,33.835 v1(5.698,34.058) ; U1.39 18.625,30.6 19.035,31.01 v1(19.82,31.01)
  Signal Layer 1 w0.25: v1(5.3,8.875) 5.3,14.05 v1(5.375,14.125) ; v1(5.698,34.058) 6.384,34.744 16.087,34.744 v1(19.82,31.01)
SWDCLK_RESET-IO: JP2.4 JP4.4 U1.28 | length 43.7
  Top Layer w0.25: JP2.4 10.145,-2.255 10.397,-2.003 10.397,3.157 JP4.4@11.715,4.475 ; v1(19.135,20.901) 19.709,21.475 U1.28
  Signal Layer 1 w0.25: JP4.4@11.715,4.475 11.715,1.61 12.3,1.025 19.1,1.025 21.65,3.575 21.65,11.2 19.275,13.575 19.275,20.76 v1(19.135,20.901)
SWDIO_RESET-TGT: JP2.2 JP4.3 U1.37 | length 56.2
  Top Layer w0.25: JP2.2 8.408,-0.985 8.408,1.311 9.475,2.378 9.475,4.175 JP4.3@9.175,4.475 ; U1.37 19.625,27.098 25.383,27.098 25.434,27.149 26.882,27.149 27.458,27.725 28.795,27.725 29.185,27.335 29.185,19.56 v1(28.55,18.925)
  Bottom Layer w0.25: JP4.3@9.175,4.475 9.175,7.817 15.825,14.467 15.825,16.118 16.501,16.794 19.558,16.794 20.989,15.363 24.85,15.363 25.188,15.025 27.275,15.025 27.714,15.464 27.714,17.214 28.55,18.05 v1(28.55,18.925)
SYNC: U3.12
TX1: U1.33 U3.3 | length 28.2
  Top Layer w0.25: v1(14.451,21.151) 14.559,21.151 15.045,21.637 17.124,21.637 19.462,23.975 U1.33
  Signal Layer 1 w0.25: U3.3 6.189,30.25 7.527,28.912 7.527,20.647 v1(8.975,19.199)
  Bottom Layer w0.25: v1(8.975,19.199) 12.498,19.199 v1(14.451,21.151)
TX2: B2.21 U1.18 | length 17.4
  Top Layer w0.25: v1(16.625,17.624) U1.18
  Bottom Layer w0.25: v1(16.625,17.624) 16.874,17.375 19.55,17.375 19.725,17.2 27,17.2 27.525,17.725 27.525,19.825 28.025,20.325 B2.21
TXD0: B2.3 U1.46 | length 23
  Top Layer w0.25: B2.3 v1(2.277,25.142) ; U1.46 15.125,26.362 v1(15.553,26.133)
  Signal Layer 1 w0.25: v1(15.553,26.133) 16.899,27.479 v1(16.899,27.987)
  Bottom Layer w0.25: v1(2.277,25.142) 2.36,25.225 6.667,25.225 10.065,28.623 16.264,28.623 v1(16.899,27.987)
USB+: JP1.3 U1.20 | length 21.7
  Top Layer w0.25: v1(16.532,13.495) 18.056,15.019 18.056,16.194 17.625,16.625 U1.20
  Bottom Layer w0.25: v1(16.532,13.495) 15.807,12.77 15.807,3.75 16.807,2.75 18.75,2.75 19.158,2.342 19.158,0.608 JP1.3
USB-: JP1.2 U1.19 | length 20.7
  Top Layer w0.25: U1.19 17.125,18.225 17.167,18.225 17.167,16.21 17.525,15.852 v1(17.525,15.6)
  Bottom Layer w0.25: v1(17.525,15.6) 18.576,14.549 18.576,9.574 21.75,6.4 21.75,3.968 19.85,2.068 JP1.2
VBUS: C12.2 D6.1 JP1.1 R5.1 | length 30.1
  Top Layer w0.25: R5.1 24.15,-0.775 24.15,-2.025 25.861,-3.736 C12.2 27.75,-2.986 v1(27.75,-1.75) ; D6.1 27.965,8.31 28.525,7.75 v2(28.525,2.575)
  Bottom Layer w0.25: JP1.1 20.65,1.3 21.725,2.375 27.6,2.375 ; 27.6,2.35 27.725,2.35 ; v1(27.75,-1.75) 27.775,-1.75 27.15,-1.125 27.15,0.025 27.725,0.6 27.725,2.35 ; v2(28.525,2.575) 28.3,2.35 27.725,2.35
WAKEUP/ADC2: B2.18 R2.1 SW3.2 U1.38 U3.15 | length 68.4
  Top Layer w0.25: SW3.2 18.35,-5.325 26.513,-5.325 v1(26.983,-4.855) ; R2.1 19.135,32.64 20.6,31.174 20.6,29.157 19.125,27.682 U1.38 19.125,26.463 19.43,26.158 21.878,26.158 22.614,25.422 25.128,25.422 U3.15 ; B2.18 28.5,10.725 28.5,9.775 29.363,8.912 v1(30.488,8.912)
  Signal Layer 1 w0.25: U3.15 27.136,24.25 28.025,23.361 28.025,23.358 28.333,23.05 28.336,23.05 29.15,22.236 29.15,18.424 28.375,17.649 28.375,14.81 B2.18
  Bottom Layer w0.25: v1(26.983,-4.855) 26.983,-3.259 29.05,-1.192 29.05,3.475 28.4,4.125 28.4,8.225 29.087,8.912 v1(30.488,8.912)
XTALIN: C7.1 U1.6 Y2.3 | length 11.6
  Top Layer w0.25: Y2.3@6.575,24.725 6.6,24.7 6.875,24.7 6.9,24.725 6.9,27 7.125,27.225 9.9,27.225 11.235,25.89 11.235,23.534 11.794,22.975 U1.6
XTALOUT: C9.1 U1.7 Y2.1 | length 6.3
  Top Layer w0.25: C9.1 8.435,21.231 8.483,21.278 Y2.1 10.473,22.315 10.633,22.475 U1.7
pads on no net: B2.0 JP1.4 JP2.6 JP2.7 JP2.8 SW1.3 SW1.4 SW2.3 SW2.4 SW3.3 SW3.4 U1.25 U2.4 U3.8 U3.14

## Polygon pours and split planes (outlines as drawn)
GND on GND-PLANE (split plane): 31.348,-7.223 -0.873,-7.223 -0.873,35.148 31.348,35.148

## Keep-outs
Keep-Out Layer:
  lines w0.35: -1.275,35.55 31.75,35.55 31.75,-7.615 31.74,-7.625 -1.275,-7.625 -1.275,35.565

## Silkscreen, mask and mechanical layers (free items; w line width, h text height)
Top Overlay:
  lines w0.2: 12.425,29.5 12.425,33.275 17.45,33.275 17.5,33.225 17.5,29.5 12.425,29.5
  text "20" at 23.725,33.675 h2
  text "1" at 5.65,33.625 h2
  text "11" at 23.775,15.675 h2
  text "10" at 5.6,15.625 h2
  text "CUR" at 17,6.025 h2
  text "1" at 3.8,6 h2
  text "JTAG" at 4.8,1.4 h2
  text "1" at 2.975,-1.475 h2 r90
  text "ISP" at 25.4,-6.6 h2 r90
  text "RST" at 20.275,-6.725 h2 r90
  text "WAKE" at 11.275,-6.975 h2 r90
Bottom Overlay:
  lines w0.35: 3.275,35.1 3.275,15.25 27.4,15.25 27.4,35.075 ; 17.555,6.3 17.555,7.85 20.125,7.85 20.125,6.275
  text "3.3V" at 8.25,33.625 h2
  text "DO" at 7.525,31.5 h2
  text "SCL" at 25.15,31.375 h2
  text "SCK" at 25.15,29.65 h2
  text "DI" at 6.85,29.6 h2
  text "SS" at 25.175,27.625 h2
  text "MISO" at 8.925,27.6 h2
  text "RST" at 8.25,25.75 h2
  text "PWR" at 25.225,25.6 h2
  text "SDA" at 8.375,23.825 h2
  text "WKUP" at 25.175,23.625 h2
  text "SCL" at 8.225,21.65 h2
  text "IRQ" at 25.15,19.65 h2
  text "SLP" at 8.15,17.7 h2
  text "SYNC" at 25.15,17.625 h2
  text "GND" at 8.5,15.75 h2
  text "MOSI" at 25.2,15.625 h2
  text "RESET-CPU" at 14,6.125 h2 r270
  text "J-SWDIO" at 8.825,6.1 h2 r270
  text "J-VCC" at 3.825,6.05 h2 r270
  text "J-SWCLK" at 11.5,6.05 h2 r270
  text "GND" at 6.325,6 h2 r270
Mechanical 1:
  lines w0.15: 5.1,3.4 21.1,3.4 21.1,19.375 5.1,19.375 5.1,3.4
Mechanical 2:
  lines w0.15: 201.849,96.286 201.894,96.331
Mechanical 3:
  lines w0.25: -1.275,-7.615 -1.275,35.565 31.75,35.565 31.75,-7.615 -1.275,-7.615

## Text inside footprints (layer, text, board x,y; h text height)
B2: Top Overlay "5V" at 1.9,1.175 h1.7 r270; Top Overlay "RST" at 1.895,3.78 h1.7 r270; Top Overlay "SS" at 1.895,5.905 h1.7 r270; Top Overlay "SCK" at 1.895,8.805 h1.7 r270; Top Overlay "SI" at 1.895,10.28 h1.7 r270; Top Overlay "MISO" at 1.895,13.655 h1.7 r270; Top Overlay "SCL" at 1.895,16.305 h1.7 r270; Top Overlay "SDA" at 1.895,19.08 h1.7 r270; Top Overlay "GND" at 1.895,26.805 h1.7 r270; Top Overlay "3.3" at 1.895,28.955 h1.7 r270; Top Overlay "5V" at 27.725,0.875 h1.7 r270; Top Overlay "GND" at 27.725,26.8 h1.7 r270; Top Overlay "3.3" at 27.725,28.95 h1.7 r270; Top Overlay "n-baseU68" at 4.55,9.8 h2.5; Top Overlay "UART" at 1.9,23.625 h1.7 r270; Mechanical 15 "S4" at 2.75,-4.725 h0.8 r270; Mechanical 15 "S3" at 2.5,32.025 h0.8 r270; Mechanical 15 "S2" at 27.25,-4.725 h0.8 r270; Mechanical 15 "S1" at 27.25,33.275 h0.8 r270